# EAGLE board stream_i-o_2_3_Front (EAGLE 7.4.0)
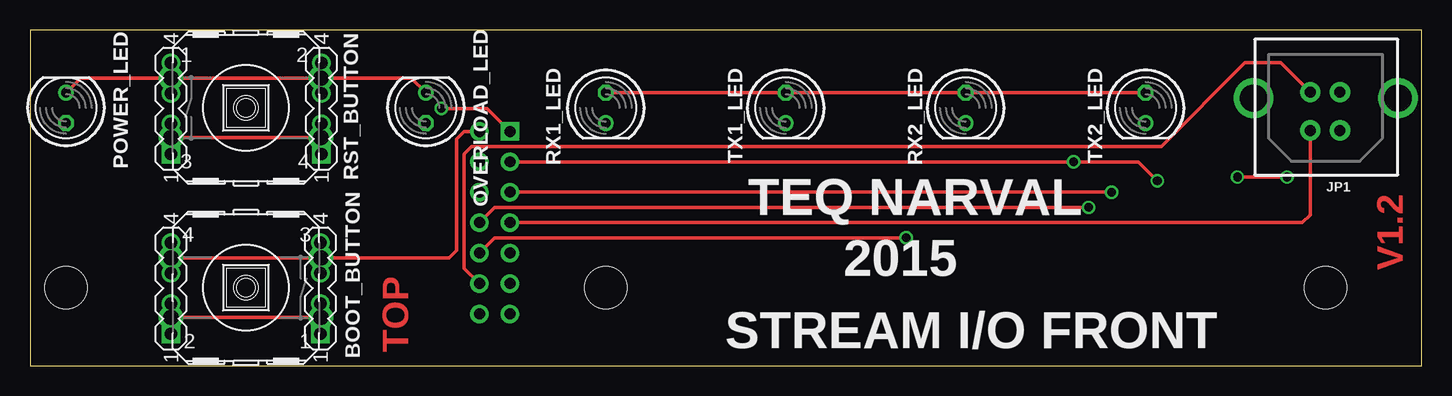
[diagram p0: board, top side]
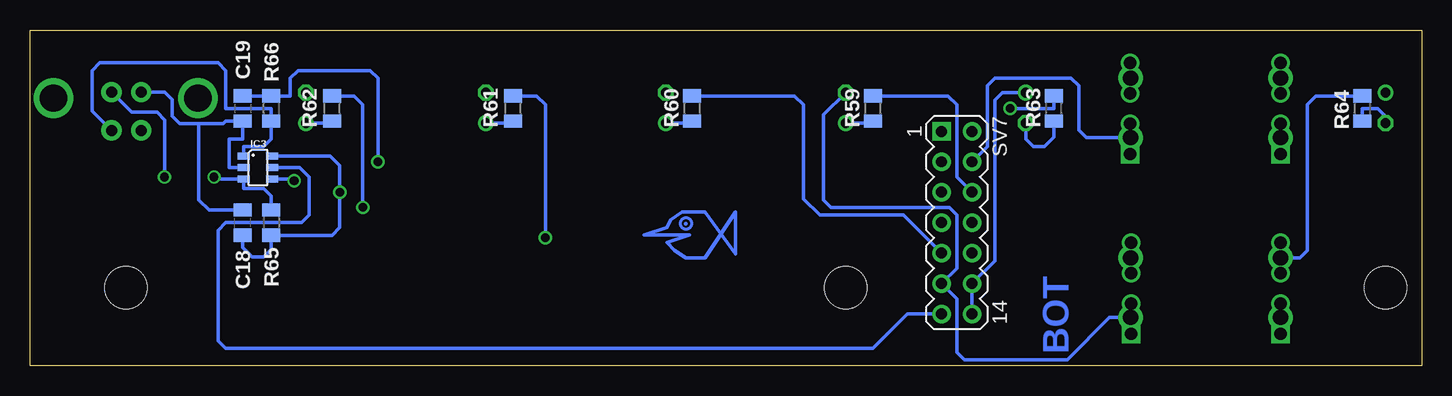
[diagram p1: board, bottom side, seen from below]

Size 116 x 28 mm. Coordinates in mm from the lower left corner, seen from the top.
Outline: 0,0 116,0 116,28 0,28 0,0
Copper layers (1*16): Top 0.035mm / dielectric 1.5mm / Bottom 0.035mm
Design rules "10mil *": minimum track width 10mil, minimum drill 24mil, track to track 7mil, track to pad 7mil, pad to pad 7mil, via to via 7mil, smd to smd 7mil, copper to edge 5mil, drill to drill 5mil, minimum pad ring 10mil, minimum via ring 8mil, stop-mask expansion 4mil, vias tented up to drill 0mil, thermal gap 10mil
Net classes: 0 default: width 0.203 mm, clearance 0.203 mm
Holes 3.5 mm at 48,6.5 108,6.5 3,6.5

## Footprints (pad centres in the part's own frame; a part is rotated, then mirrored left to right if it is on the bottom)
RACON12 = drill 1.27 pad 2.032: 1 -6.248,2.489; 2 6.248,2.489; 3 -6.248,-2.489; 4 6.248,-2.489
C0805 = smd 1.1 x 1.5: 1 -1.05,0; 2 1.05,0
TSOP-6 = smd 0.6 x 1: 1 -0.95,-1.2; 2 0,-1.2; 3 0.95,-1.2; 4 0.95,1.2; 5 0,1.2; 6 -0.95,1.2
USB-B-PTH-VERTICAL = drill 0.914 pad 1.676: D+ -1.206,-1.321; D- -1.206,1.88; GND 1.283,-1.321; VBUS 1.283,1.88 | drill 2.286: P$1 -6.032,-0.813; P$2 6.007,-0.813
LED5MM = drill 0.813 octagon: A -1.27,0 | drill 0.813: K 1.27,0
R0805 = smd 1.1 x 1.5: 1 -1.05,0; 2 1.05,0
MA04-1 = drill 1.016 square: 1 -3.81,0 | drill 1.016: 2 -1.27,0; 3 1.27,0; 4 3.81,0
MA07-2 = drill 0.914 pad 1.524 square: 1 -7.62,-1.27 | drill 0.914 pad 1.524: 2 -7.62,1.27; 3 -5.08,-1.27; 4 -5.08,1.27; 5 -2.54,-1.27; 6 -2.54,1.27; 7 0,-1.27; 8 0,1.27; 9 2.54,-1.27; 10 2.54,1.27; 11 5.08,-1.27; 12 5.08,1.27; 13 7.62,-1.27; 14 7.62,1.27

## Placement (x,y rotation side)
BOOT_BUTTON  BUTTONRACON12  [RACON12]  18,6.5 180 top
C18  47p  [C0805]  98.27,11.92 90 bottom
C19  47p  [C0805]  98.27,21.44 270 bottom
IC3  BEM_VEDO  [TSOP-6]  97,16.52 270 bottom
JP1  USBPTH-VERTICAL  [USB-B-PTH-VERTICAL]  108,21.5 180 top
OVERLOAD_LED  RED  [LED5MM]  33,21.5 90 top
POWER_LED  KEK  [LED5MM]  3,21.5 90 top
R59  470  [R0805]  45.72,21.44 90 bottom
R60  2k2  [R0805]  60.8,21.44 90 bottom
R61  470  [R0805]  75.72,21.44 90 bottom
R62  2k2  [R0805]  90.81,21.44 90 bottom
R63  1k  [R0805]  30.64,21.44 90 bottom
R64  1k  [R0805]  4.92,21.44 90 bottom
R65  33  [R0805]  95.89,11.92 270 bottom
R66  33  [R0805]  95.89,21.44 90 bottom
RST_BUTTON  BUTTONRACON12  [RACON12]  18,21.5 0 top
RX1_LED  ORANGE  [LED5MM]  48,21.5 270 top
RX2_LED  ORANGE  [LED5MM]  78,21.5 270 top
SV3  [MA04-1]  11.75,21.44 90 top
SV4  [MA04-1]  24.29,21.44 90 top
SV5  [MA04-1]  11.75,6.44 90 top
SV6  [MA04-1]  24.21,6.44 90 top
SV7  [MA07-2]  38.73,11.92 270 bottom
TX1_LED  GREEN  [LED5MM]  63,21.5 270 top
TX2_LED  GREEN  [LED5MM]  93,21.5 270 top

## Library data of the parts
BOOT_BUTTON RST_BUTTON = Cf_Egyeb
C18 C19 R59-R66 = rcl
IC3 = narval
JP1 = SparkFun-Connectors
OVERLOAD_LED POWER_LED RX1_LED RX2_LED TX1_LED TX2_LED = led
SV3-SV7 = con-lstb; OC_FARNELL: unknown; OC_NEWARK: unknown

## Nets
N$149: R59.1 RX1_LED.K
N$150: R60.1 TX1_LED.K
N$153: R61.1 RX2_LED.K
N$154: IC3.5 SV7.13
N$155: R62.1 TX2_LED.K
N$159: RST_BUTTON.3 RST_BUTTON.4 SV7.4
N$160: R59.2 SV7.6
N$161: R60.2 SV7.9
N$162: R61.2 SV7.10
N$163: R62.2 SV7.8
N$164: C18.2 C19.2 IC3.2 JP1.GND OVERLOAD_LED.K POWER_LED.K RST_BUTTON.1 RST_BUTTON.2 SV7.12 SV7.14
N$165: POWER_LED.A R64.1
N$166: OVERLOAD_LED.A R63.1
N$167: IC3.3 JP1.D+ R65.1
N$168: BOOT_BUTTON.3 BOOT_BUTTON.4 R64.2 SV7.2
N$169: R63.2 SV7.1
N$172: C18.1 IC3.6 R65.2 SV7.5
N$173: JP1.VBUS SV7.7
N$174: C19.1 IC3.4 R66.2 SV7.3
N$176: IC3.1 JP1.D- R66.1
N$180: BOOT_BUTTON.1 BOOT_BUTTON.2 RX1_LED.A RX2_LED.A SV7.11 TX1_LED.A TX2_LED.A

## Tracks (layer width: path | path; a pad name or v marks a point on that pad's centre or on a via)
HALACSKA4
  Bottom 0.305: 57.2,12.8 57.2,9.31 59.73,12.8 61.64,12.8 62.59,12.16 62.91,11.53 64.81,10.9 61.01,10.9 62.91,10.26 62.27,9.62 61.32,8.99 59.73,8.99 57.2,12.8
N$149
  Bottom 0.305: R59.1 45.88,20.23 RX1_LED.K
N$150
  Bottom 0.305: R60.1 60.97,20.23 TX1_LED.K
N$153
  Bottom 0.305: R61.1 75.89,20.23 RX2_LED.K
N$154
  Bottom 0.305: SV7.13 42.86,4.3 45.72,1.44 99.69,1.44 100.33,2.08 100.33,11.28 99.69,11.92 93.34,11.92 92.71,12.55 92.71,15.73 93.5,16.52 | 93.5,16.52 | 93.5,16.52 IC3.5 | IC3.5
N$155
  Bottom 0.305: R62.1 90.97,20.23 TX2_LED.K
N$159
  Top 0.305: RST_BUTTON.4 RST_BUTTON.3
  Bottom 0.305: RST_BUTTON.4 27.94,19.01 28.57,19.65 28.57,23.35 29.21,23.98 35.56,23.98 36.2,23.35 36.2,18.27 SV7.4
N$160
  Bottom 0.305: SV7.6 38.73,15.73 38.73,21.76 39.47,22.5 R59.2
N$161
  Bottom 0.305: R60.2 | SV7.9 43.18,12.55 50.16,12.55 51.52,13.91 51.52,21.76 52.25,22.5 60.64,22.5 R60.2
N$162  (via drill 0.71 pad 1.12)
  Top 0.305: v73.03,10.65 38.73,10.65 SV7.10
  Bottom 0.305: v73.03,10.65 73.03,21.76 73.76,22.5 R61.2
N$163  (via drill 0.71 pad 1.12)
  Top 0.305: v88.27,13.19 38.73,13.19 SV7.8
  Bottom 0.305: v88.27,13.19 88.27,21.76 89,22.5 R62.2
N$164
  Top 0.305: JP1.GND 104.28,25.25 101.28,25.25 94.3,18.27 36.83,18.27 36.2,17.64 36.2,8.11 SV7.12 | POWER_LED.K 4.22,23.99 RST_BUTTON.1 RST_BUTTON.2 31.78,23.99 OVERLOAD_LED.K
  Bottom 0.305: OVERLOAD_LED.K 34.92,22.77 35.56,22.14 35.56,8.74 SV7.12 SV7.14 | JP1.GND 104.78,22.82 104.14,22.19 104.14,20.81 103.5,20.17 101.92,20.17 | 101.92,20.17 101.92,13.83 101.06,12.97 C18.2 | C19.2 | C19.2 99.69,20.39 99.92,20.17 101.92,20.17 | IC3.2 99.38,16.52 99.38,18.91 98.27,18.91 C19.2 | C18.2 | IC3.2
N$165
  Bottom 0.305: POWER_LED.A 3,20.78 3.66,21.44 4.92,21.44 R64.1 | R64.1
N$166
  Bottom 0.305: OVERLOAD_LED.A 33,18.91 32.37,18.27 31.43,18.27 30.64,19.06 R63.1 | R63.1
N$167  (via drill 0.71 pad 1.12)
  Top 0.305: v104.78,15.73 v100.65,15.73
  Bottom 0.305: IC3.3 98.2,14.78 96.52,14.78 95.89,14.14 R65.1 | IC3.3 100.49,15.57 v100.65,15.73 | v104.78,15.73 104.78,20.49 105.41,21.13 107.51,21.13 JP1.D+ | IC3.3
N$168
  Top 0.305: SV7.2 36.2,19.54 35.56,18.91 35.56,9.62 34.92,8.99 BOOT_BUTTON.3 BOOT_BUTTON.4
  Bottom 0.305: BOOT_BUTTON.4 10.16,8.99 9.53,9.62 9.53,21.76 8.79,22.5 5.08,22.5 R64.2 | R64.2
N$169  (via drill 0.71 pad 1.12)
  Top 0.305: v34.29,21.44 38.1,21.44 SV7.1
  Bottom 0.305: v34.29,21.44 30.64,21.44 R63.2 | R63.2
N$172  (via drill 0.71 pad 1.12)
  Top 0.305: v90.17,14.46 SV7.5
  Bottom 0.305: IC3.6 90.96,17.47 90.17,16.68 v90.17,14.46 90.17,11.51 90.81,10.87 R65.2 95.89,9.7 96.52,9.06 97.47,9.06 98.27,9.86 C18.1 | C18.1 | IC3.6
N$173
  Top 0.305: JP1.VBUS 106.72,12.55 106.08,11.92 SV7.7
N$174  (via drill 0.71 pad 1.12)
  Top 0.305: 93.66,15.73 v93.98,15.41 92.39,17 v87,17 SV7.3
  Bottom 0.305: v87,17 87,23.98 87.63,24.62 93.66,24.62 94.3,23.98 94.3,22.5 R66.2 C19.1 | v93.98,15.41 94.14,15.57 IC3.4 | IC3.4 | C19.1
N$176
  Bottom 0.305: JP1.D- 110.81,21.22 110.81,24.62 110.17,25.25 100.33,25.25 99.69,24.62 99.69,21.44 95.89,21.44 R66.1 95.89,18.91 96.52,18.27 98.2,18.27 IC3.1 | IC3.1
N$180
  Top 0.305: BOOT_BUTTON.1 BOOT_BUTTON.2 | TX2_LED.A RX2_LED.A TX1_LED.A RX1_LED.A
  Bottom 0.305: BOOT_BUTTON.1 26.01,4.01 29.53,0.49 38.1,0.49 38.73,1.12 38.73,5.57 SV7.11 38.73,8.11 38.73,12.55 39.37,13.19 49.21,13.19 49.85,13.83 49.85,20.92 RX1_LED.A
(copper drawn outside any net)
  shapes: Bottom circle x2

## Text on the board
Top: TOP | V1.2
Bottom: BOT
tNames: TEQ NARVAL | 2015 | STREAM I/O FRONT